# Altium PCB STM32F103C8T6_JLINK-OB_V1.0.PcbDoc
Units mil, origin at the board's own origin, x right, y up, seen from the top; angles counter-clockwise.
Board outline 1770 x 755 mil, 2 copper layers (Top Layer, Bottom Layer); 40 components, 32 nets, 139 pads, 110 vias.
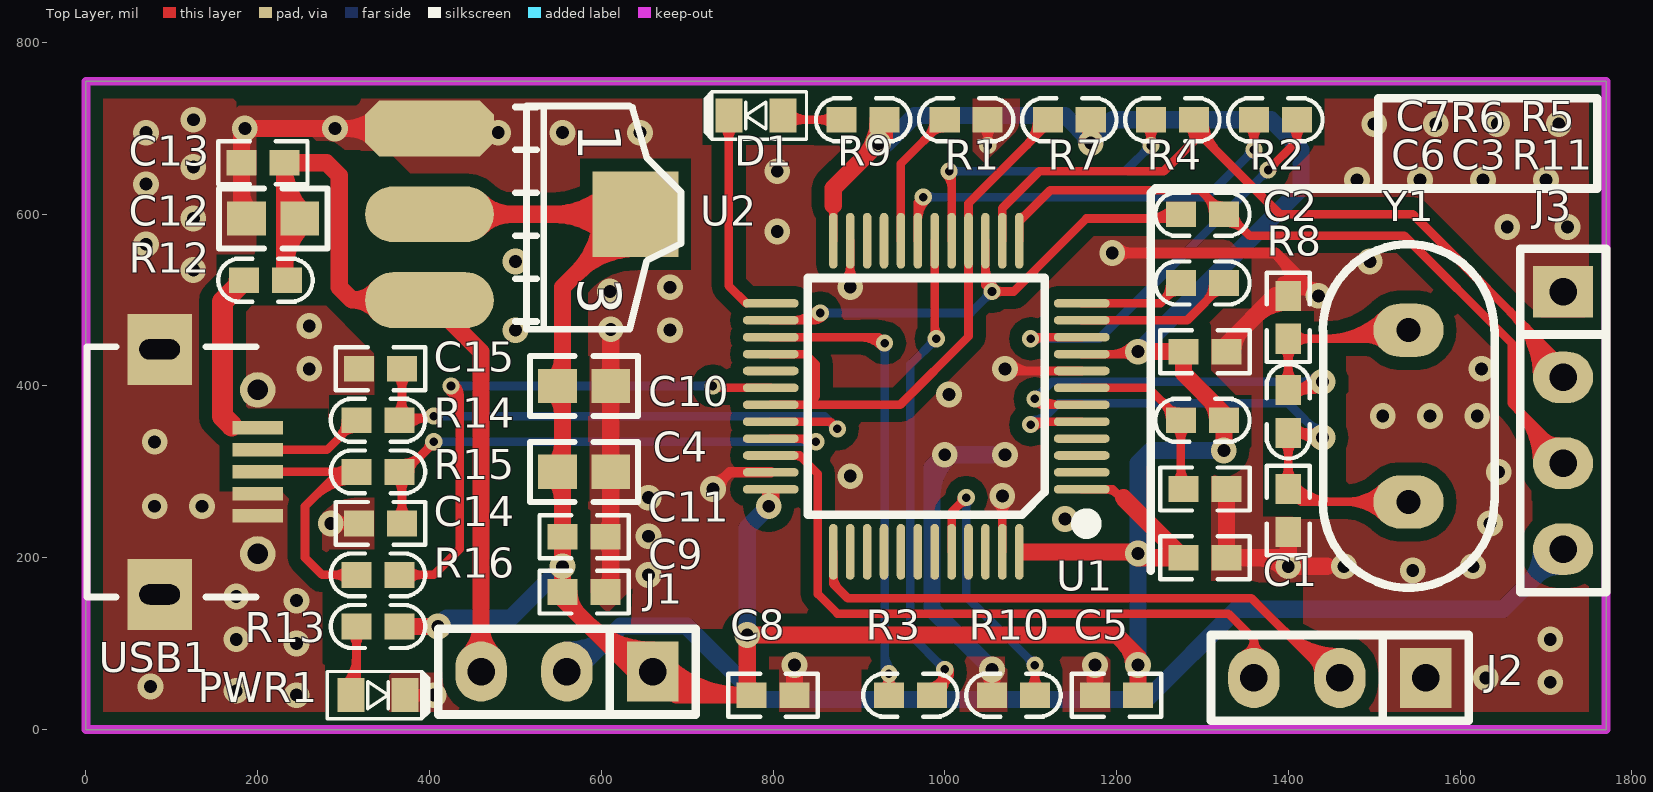
[diagram p0: Top Layer view]
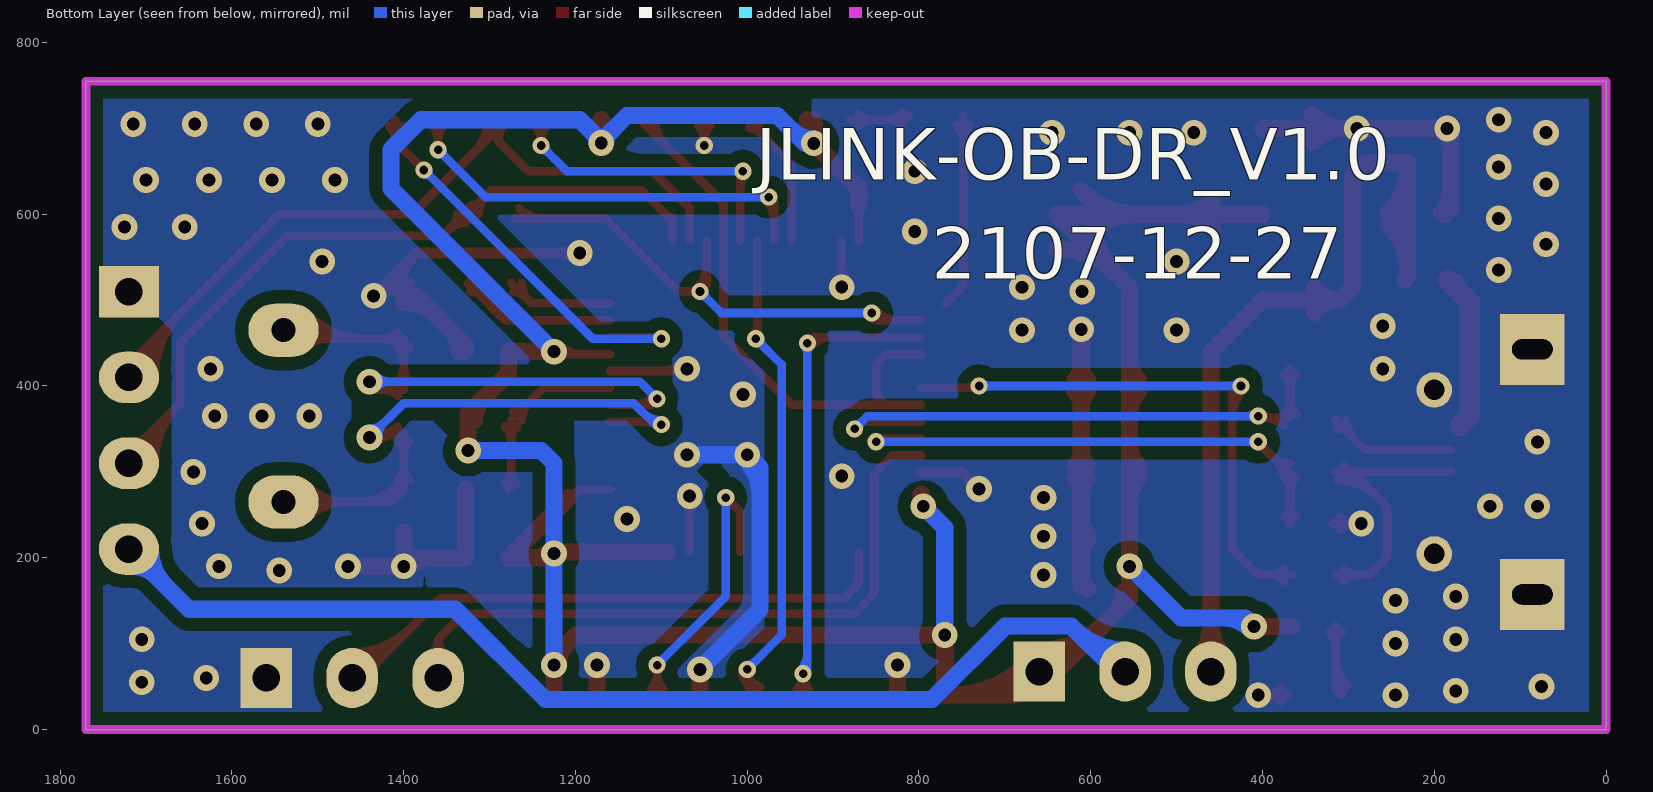
[diagram p1: Bottom Layer view, seen from below]
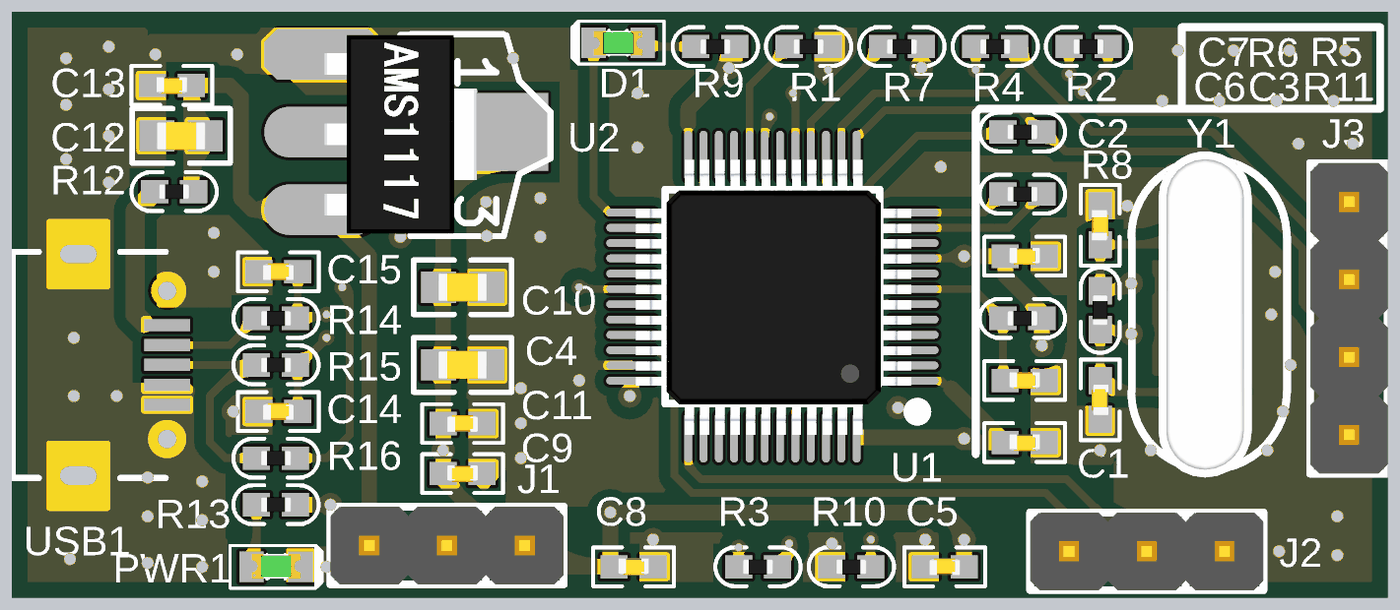
[diagram p2: 3D render of the assembled board from above, using the file's embedded part models]

## Layer stack, top to bottom
Top Layer: signal copper 1.4
Dielectric: dielectric 12.6, FR-4, Dk 4.8
Bottom Layer: signal copper 1.4

## Board outline
0,0 1770,0 1770,755 0,755

## Design rules (kind name [scope] priority, off if disabled: settings)
Clearance Clearance_1 [InPolygon] p1: gap=15
Clearance [All] p2: gap=7.87
MinimumSolderMaskSliver [All] p1 off: minsoldermaskwidth=10
PolygonConnect [All] p1: connectstyle=Direct reliefconductorwidth=10 reliefentries=4 polygonreliefangle="90 Angle"
RoutingVias [All] p1: holewidth=10 width=20 viastyle="Through Hole" minholewidth=8 minwidth=16 maxholewidth=28 maxwidth=50
SilkToSilkClearance [All] p1 off: silktosilkclearance=10
SilkscreenOverComponentPads [All] p1 off: minsilkscreentomaskgap=10
SolderMaskExpansion [All] p1: expansion=4
Width [All] p1: maxlimit=100 minlimit=7.87 preferedwidth=10
25 further rules are at their usual default settings.

## Components (designator, comment, footprint, x,y, rotation, side; value= is the part's Value field where it differs from the comment)
C1 "22pF" C0402 1400,255 r0 top
C2 "22pF" C0402 1400,480 r180 top
C3 "0.1uF" C0402 1303,280 r90 top
C4 "4.7uF" C0603 580,300 r270 top
C5 "1uF" C0402 1200,40 r270 top
C6 "0.1uF" C0402 1303,200 r90 top
C7 "0.1uF" C0402 1303,440 r90 top
C8 "0.1uF" C0402 800,40 r90 top
C9 "0.1uF" C0402 580,160 r90 top
C10 "10uF" C0603 580,400 r90 top
C11 "0.1uF" C0402 580,224.5 r270 top
C12 "10uF" C0603 218,595 r270 top
C13 "0.1uF" C0402 206,660 r90 top
C14 "22pF" C0402 343,240 r270 top
C15 "22pF" C0402 343,420 r270 top
D1 "LED1" LED0603-green 780,715 r180 top
J1 "CON3" HEADER-3 560,67.5 r180 top
J2 "CON3" HEADER-3 1460,60 r180 top
J3 "CON4" HEADER-4 1720,360 r270 top
PWR1 "RED" LED0603-green 340,40 r0 top
R1 "10K" "R0402 -1" 1025,710 r90 top
R2 "100R" "R0402 -1" 1385,710 r270 top
R3 "100R" "R0402 -1" 960,40 r90 top
R4 "100R" "R0402 -1" 1265,710 r90 top
R5 "100R" "R0402 -1" 1300,600 r90 top
R6 "100R" "R0402 -1" 1300,520 r270 top
R7 "10K" "R0402 -1" 1145,710 r270 top
R8 "1M" "R0402 -1" 1400,370.5 r0 top
R9 "510R" "R0402 -1" 905,710 r270 top
R10 "10K" "R0402 -1" 1080,40 r90 top
R11 "10K" "R0402 -1" 1300,360 r270 top
R12 "0R" "R0402 -1" 209,523.24 r90 top
R13 "510R" "R0402 -1" 340,120 r90 top
R14 "22R" "R0402 -1" 340,360 r270 top
R15 "22R" "R0402 -1" 340,300 r270 top
R16 "1.5K" "R0402 -1" 340,180 r90 top
U1 "STM32F103C8T6" LQFP48S 1160,280 r180 top locked
U2 "AMS1117-3.3" AMS1117 400,700 r270 top
USB1 "Micro usb" MICRO_USB_9 200,300 r270 top
Y1 "XTAL" XTAL 1540,365 r90 top

## Footprints (in the part's own frame and the unit in brackets; to place one, negate y for a bottom-side part, rotate by r counter-clockwise, add the part's x,y. Pads: shape width x height; smd on the part's side, far side on the other; paste and mask are expansions set on the pad)
AMS1117 [mil]
  oct 65x150 smd: 1(0.03,-0.06)
  oval 65x150 smd: 2(100.03,-0.06) 3(200.03,-0.06)
  rect 100x100 smd: 4(100.03,239.94)
  silkscreen extent -26,100 234,293, body extent -25,-38 231,238, height 33
C0402 [mil] "SMT电容"
  rect 30x35 smd: 1(0,-25) 2(0,25)
  silkscreen extent -25,-52 25,52, body extent -11,-20 11,20, height 20
C0603 [mil] "SMT电容"
  rect 40x45 smd: 1(0,31) 2(0,-31)
  silkscreen extent -35,-63 35,63, body extent -18,-32 18,31, height 31
HEADER-3 [mil]
  rect 60x70 hole 32: 1(-100,0)
  oval 60x70 hole 32: 2(0,0) 3(100,0)
  silkscreen extent -150,-50 150,50, body extent -150,-50 150,50, height 398
HEADER-4 [mil]
  rect 60x70 hole 32: 1(-150,0)
  oval 60x70 hole 32: 2(-50,0) 3(50,0) 4(150,0)
  silkscreen extent -200,-50 200,50, body extent -200,-50 200,50, height 398
LED0603-green [mm]
  rect 0.8x1 smd: 1(-0.8,0) 2(0.8,0)
  silkscreen extent -1.5,-0.7 1.5,0.7, body extent -0.8,-0.38 0.8,0.42, height 0.6
LQFP48S [mil] "DPIN-0.5"
  oval 65x10 smd: 1(0.42,0.29) 2(0.42,-19.39) 3(0.42,-39.08) 4(0.42,-58.76) 5(0.42,-78.45) 6(0.42,-98.13) 7(0.42,-117.82) 8(0.42,-137.5) 9(0.42,-157.19) 10(0.42,-176.87) 11(0.42,-196.56) 12(0.42,-216.24) 25(362.63,-216.24) 26(362.63,-196.56) 27(362.63,-176.87) 28(362.63,-157.19) 29(362.63,-137.5) 30(362.63,-117.82) 31(362.63,-98.13) 32(362.63,-78.45) 33(362.63,-58.76) 34(362.63,-39.08) 35(362.63,-19.39) 36(362.63,0.29)
  oval 10x65 smd: 13(73.26,-289.08) 14(92.94,-289.08) 15(112.63,-289.08) 16(132.31,-289.08) 17(152,-289.08) 18(171.68,-289.08) 19(191.37,-289.08) 20(211.05,-289.08) 21(230.74,-289.08) 22(250.42,-289.08) 23(270.11,-289.08) 24(289.79,-289.08) 37(289.79,73.13) 38(270.11,73.13) 39(250.42,73.13) 40(230.74,73.13) 41(211.05,73.13) 42(191.37,73.13) 43(171.68,73.13) 44(152,73.13) 45(132.31,73.13) 46(112.63,73.13) 47(92.94,73.13) 48(73.26,73.13)
  silkscreen extent -10,-246 319,46, body extent 3,-284 357,70, height 59
MICRO_USB_9 [mm]
  rect 0.4x1.5 smd: 1(-1.3,0) 2(-0.65,0) 3(0,0) 4(0.65,0) 5(1.3,0)
  round 1.05 hole 0.6: 6(-2.425,0) 7(2.425,0)
  rect 2.1x1.9 hole 0.6 slot 1.2 at 90 deg: 8(-3.625,-2.9) 9(3.625,-2.9)
  silkscreen extent -3.7,-5.05 3.7,-0.05
"R0402 -1" [mil] "SMT电阻"
  rect 30x35 smd: 1(0,-25) 2(0,25)
  silkscreen extent -25,-55 25,55, body extent -10,-20 10,20, height 15
XTAL [mil]
  oval 62x82 hole 28: 1(-100,0) 2(100,0)
  silkscreen extent -200,-100 200,100, body extent -210,-55 210,65, height 122

## Part data
C1 C2 C4 C5 C6 C7 C8 C9: library part CAP, "SMT电容"
C3 C11 C13: library part C
C10 C12: library part CAP
C14 C15: library part 电容
D1: library part LED0, "Typical INFRARED GaAs LED"
J1 J2 J3: "Connector"
PWR1: library part LED1
R1 R2 R3 R4 R5 R6 R7 R8 R9 R10 R11 R12 R13 R14 R15 R16: library part RES1, "SMT电阻"
U1: "STM32 ARM-based 32-bit MCU with 64 Kbytes Flash, 48-pin LQFP, Industrial Temperature"
U2: library part AMS1117
USB1: library part "USB joggle"
Y1: "Crystal Oscillator"

## Via types
v1: diameter 30, hole 15, Top Layer to Bottom Layer, tented both sides, 87 vias
v2: diameter 20, hole 10, Top Layer to Bottom Layer, tented both sides, 23 vias

## Nets (pads, with @x,y where several pads share a name; then routed paths per layer and width w, separated by ;. In a path a pad name is that pad's centre, name@x,y a point inside that pad or via, vN(x,y) a via of type N, cw(c..) or ccw(c..) an arc to the next point about the centre after c; other vN are vias at no path point)
4: U1.4
GND: C1.1 C2.1 C3.1 C4.1 C5.1 C6.1 C7.1 C8.1 C9.1 C10.2 C11.2 C12.2 C13.2 C14.1 C15.1 J2.1 J3.1 PWR1.2 R1.1 R10.2 U1.8 U1.23 U1.35 U1.47 U2.1 USB1.4 USB1.5 USB1.6 USB1.7 USB1.8 USB1.9 | length 3065.3
  Top Layer w10: v1@882.82,522.18 ccw(c865.75,539.25) 889.89,539.25 ccw(c914.03,539.25) v1@896.96,522.18 ; v1(889.89,515.11) U1.23 ; R1.1@1042.93,702.93 cw(c1025.86,685.86) 1050,685.86 cw(c1074.14,685.86) R1.1@1057.07,702.93 ; v2@1046.46,683.54 ccw(c1037.93,692.07) 1050,692.07 ccw(c1062.07,692.07) v2@1053.54,683.54 ; v2(1050,680) R1.1 ; v1@1059.98,264.98 cw(c1042.91,247.91) 1067.06,247.91 cw(c1091.2,247.91) v1@1074.13,264.98 ; U1.47 v1(1067.06,272.06) ; v1(1070,420) 1072.5,417.5 U1.8 ; v1@1077.07,412.93 cw(c1088.12,401.88) 1088.12,417.5 ; v1@1077.07,427.07 ccw(c1100.17,450.17) 1100.17,417.5
  Top Layer w12: v1(285,240) C14.1 ; v1@291.36,233.64 cw(c306.73,218.27) 306.73,240 cw(c306.73,261.73) v1@291.36,246.36 ; C14.1@309.14,233.64 ccw(c293.77,218.27) 293.77,240 ccw(c293.77,261.73) C14.1@309.14,246.36 ; PWR1.2 v1(405,40) ; PWR1.2@378.39,33.11 cw(c395.03,16.47) 395.03,40 cw(c395.03,63.53) PWR1.2@378.39,46.89 ; v1@398.64,33.64 ccw(c383.27,18.27) 383.27,40 ccw(c383.27,61.73) v1@398.64,46.36 ; v1(730,280) 749.39,299.39 U1.35 ; v1@730,289 ccw(c730,310.73) 745.36,295.36 ccw(c760.73,280) v1@739,280
  Top Layer w13: v1(1195,555) 1385,555 v1(1435,505) ; v1@1201.01,548.99 cw(c1215.52,534.48) 1215.52,555 cw(c1215.52,575.52) v1@1201.01,561.01 ; 1388.37,551.63 cw(c1348.9,512.17) C2.1@1404.48,507.09 ; C2.1@1393.22,521.13 cw(c1404.51,494.25) v1@1425.13,514.87 ; C2.1@1398.26,509.15 cw(c1412.61,474.98) v1@1438.81,501.19 ; v1@1426.5,505 ccw(c1405.98,505) 1420.49,519.51 ccw(c1435,534.02) v1@1435,513.5
  Top Layer w20: 181,627.59 ccw(c217.09,627.59) C12.2@191.57,602.07 ; 181,678.32 cw(c206.62,678.32) v1@188.5,696.43 ; C12.2@187,600 181,606 C13.2 181,696 v1(184.97,699.97) U2.1 ; U2.1@341.53,684.06 ccw(c303.12,645.65) 303.12,699.97 ccw(c303.12,754.29) U2.1@341.53,715.88 ; C9.1@603.96,163.54 ccw(c586.98,180.52) 611,180.52 ; C11.2@603.96,220.96 cw(c586.98,203.98) 611,203.98 ; C11.2@603.96,228.04 ccw(c586.98,245.02) 611,245.02 ; C4.1@603.93,292.93 cw(c586.86,275.86) 611,275.86 cw(c635.14,275.86) C4.1@618.07,292.93 ; C4.1@603.93,307.07 ccw(c586.86,324.14) 611,324.14 ccw(c635.14,324.14) C4.1@618.07,307.07 ; C10.2@603.93,392.93 cw(c586.86,375.86) 611,375.86 cw(c635.14,375.86) C10.2@618.07,392.93 ; C10.2@603.93,407.07 ccw(c586.86,424.14) 611,424.14 ccw(c635.14,424.14) C10.2@618.07,407.07 ; C9.1@611,166 C4.1 C10.2 v1(611,466) ; C8.1 v1(825,75) ; R10.2 v1(1055,70) ; C5.1 v1(1175,75) ; C3.1 C6.1 1395,200 1400,205 ; C7.1 1328,448 C2.1@1385,505 ; C7.1@1335.5,440 cw(c1372.92,440) 1346.46,466.46 ; 1361.59,481.59 cw(c1400,443.18) C2.1@1400,497.5 ; 1363.79,200 cw(c1363.79,153.79) v1@1396.46,186.46 ; C1.1 1400,205 ; 1445,190 v1(1400,190) 1400,205
  Bottom Layer w20: 985,271.72 cw(c1048.28,271.72) v1@1003.54,316.46 ; v1(1055,70) 985,140 985,305 v1(1000,320) v1@1055,320
  other v1: 245,40 175,45 75,50 1705,55 1630,60 245,100 175,105 1705,105 245,150 175,155 655,180 1545,185 1465,190 1615,190 655,225 1635,240 1140,245 80,260 135,260 655,270 890,295 1645,300 1070,320 80,335 1510,365 1565,365 1620,365 1005,390 260,420 1625,420 500,465 680,465 260,470 610,510 680,515 125,535 500,545 1495,545 70,565 805,580 1655,585 1725,585 125,595 70,635 1480,640 1553.33,640 1626.67,640 1700,640 805,650 125,655 70,695 480,695 555,695 645,695 290,699.97 1500,705 1571.67,705 1643.33,705 1715,705 125,710
JTCK: J2.2 U1.37 | length 880.1
  Top Layer w10: U1.37@870.21,179.37 ccw(c893.33,179.37) 876.98,163.02 ; U1.37 870.21,169.79 887.13,152.87 1357.13,152.87 1450,60 J2.2 ; 1391.72,118.28 ccw(c1460,186.57) J2.2@1460,90 ; 1408.79,101.21 ccw(c1460,152.43) J2.2@1460,80 ; 1425.86,84.14 ccw(c1460,118.28) J2.2@1460,70 ; 1427.93,82.07 cw(c1410.86,65) J2.2@1435,65
JTMS: J2.3 U1.34 | length 843.3
  Top Layer w10: U1.34 830.92,319.08 852.33,297.67 852.33,157.67 875,135 1330,135 1360,105 ; 833.95,316.05 ccw(c826.38,308.49) 824.87,319.08 cw(c824.87,304.47) 835.2,314.8 ; J2.3@1349.05,87.47 ccw(c1340.5,105) 1360,105 ; J2.3 1360,105 ; J2.3@1370.95,87.47 cw(c1379.5,105) 1360,105
LED: D1.2 U1.25 | length 267.9
  Top Layer w10: D1.2@740.9,703.46 cw(c722.56,685.11) 748.5,685.11 cw(c774.45,685.11) D1.2@756.1,703.46 ; D1.2 748.5,516.5 U1.25@768.76,496.24
NetC1_2: C1.2 R8.1 U1.5 Y1.1 | length 1149.9
  Top Layer w10: v2@1103.45,358.45 U1.5 ; v2@1103.54,351.46 cw(c1120.4,334.6) 1120.4,358.45 ; C1.2@1392.93,289.57 ccw(c1375.86,306.64) 1400,306.64 ccw(c1424.14,306.64) C1.2@1407.07,289.57 ; R8.1@1392.93,335.93 cw(c1375.86,318.86) 1400,318.86 cw(c1424.14,318.86) R8.1@1407.07,335.93 ; C1.2@1400,277.5 ccw(c1430.18,307.68) 1430.18,265 ; R8.1@1402.58,345.5 cw(c1402.58,302.58) v1@1432.93,332.93 ; C1.2@1407.07,284.57 ccw(c1454.32,331.82) 1454.32,265 ; R8.1@1407.07,338.43 cw(c1424.14,321.36) 1424.14,345.5 cw(c1424.14,369.64) R8.1@1407.07,352.57 ; v1(1440,340) 1434.5,345.5 R8.1 C1.2 1415,265 Y1.1 ; Y1.1@1511.62,246.62 ccw(c1467.23,202.23) 1467.23,265 ccw(c1467.23,327.77) Y1.1@1511.62,283.38 ; Y1.1@1518.69,253.69 ccw(c1491.37,226.37) 1491.37,265 ccw(c1491.37,303.63) Y1.1@1518.69,276.31
  Bottom Layer w10: v2(1100,355) 1107.35,355 1132.35,380 1400,380 v1(1440,340) ; v2@1100,360 ccw(c1100,389.81) 1121.08,368.73 ; v1@1430,340 ccw(c1405.86,340) 1422.93,357.07 ccw(c1440,374.14) v1@1440,350
NetC2_2: C2.2 R8.2 U1.6 Y1.2 | length 1124.7
  Top Layer w10: v2(1105,385) 1111.87,378.13 U1.6 ; v2@1108.54,388.54 ccw(c1133.65,413.65) U1.6@1133.65,378.13 ; R8.2@1392.93,405.07 ccw(c1375.86,422.14) 1400,422.14 ccw(c1424.14,422.14) R8.2@1407.07,405.07 ; C2.2@1392.93,445.43 cw(c1375.86,428.36) 1400,428.36 cw(c1424.14,428.36) C2.2@1407.07,445.43 ; R8.2@1407.07,388.43 cw(c1424.14,371.36) 1424.14,395.5 cw(c1424.14,419.64) R8.2@1407.07,402.57 ; C2.2@1407.07,447.93 cw(c1424.14,430.86) 1424.14,455 cw(c1424.14,479.14) C2.2@1407.07,462.07 ; 1420.51,395.5 ccw(c1420.51,420.23) v1(1440,405) ; v1@1430.5,395.5 R8.2 ; v1@1432.12,411.16 cw(c1400,436.27) R8.2 ; 1443.09,455 ccw(c1443.09,551.91) Y1.2@1511.62,483.38 ; 1467.23,455 ccw(c1467.23,527.77) Y1.2@1518.69,476.31 ; Y1.2@1511.62,446.62 ccw(c1491.37,426.37) 1491.37,455 ccw(c1491.37,503.63) Y1.2@1525.76,469.24 ; Y1.2 1530,455 C2.2 R8.2
  Bottom Layer w10: v2(1105,385) 1125,405 v1(1440,405) ; v2@1105,390 ccw(c1105,402.07) 1113.54,393.54 ccw(c1122.07,385) v2@1110,385 ; v1@1432.93,397.93 ccw(c1415.86,380.86) 1415.86,405 ccw(c1415.86,429.14) v1@1432.93,412.07
NetC3_2: C3.2 R11.1 U1.7 | length 326.1
  Top Layer w10: U1.7 1237.18,397.82 R11.1 1275,283 C3.2 ; 1253.66,381.34 cw(c1232.32,360) R11.1@1262.5,360 ; 1259.7,375.3 ccw(c1272.5,388.11) R11.1@1272.5,370 ; R11.1@1267.93,352.93 cw(c1250.86,335.86) 1275,335.86 cw(c1299.14,335.86) R11.1@1282.07,352.93 ; C3.2@1268.43,287.07 ccw(c1252.57,302.93) 1275,302.93 ; 1275,305.35 ccw(c1300.85,305.35) C3.2@1282.57,287.07
NetD1_1: D1.1 R9.1 | length 149.3
  Top Layer w10: D1.1 816.5,710 R9.1 ; D1.1@819.1,703.46 cw(c834.88,687.68) 834.88,710 ; D1.1@819.1,718.66 ccw(c840.01,739.58) 840.01,710 ; R9.1@870.43,702.93 ccw(c853.36,685.86) 853.36,710 ccw(c853.36,734.14) R9.1@870.43,717.07
NetPWR1_1: PWR1.1 R13.2 | length 177.3
  Top Layer w10: PWR1.1@300.9,51.54 ccw(c266.87,85.57) 315,85.57 ; PWR1.1@307.97,44.47 ccw(c291.01,61.43) 315,61.43 ; R13.2@307.93,112.93 cw(c290.86,95.86) 315,95.86 cw(c339.14,95.86) R13.2@322.07,112.93 ; PWR1.1 315,46.5 R13.2
NetR1_2: R1.2 U1.20 | length 239.9
  Top Layer w10: 948.95,608.95 U1.20 948.95,658.95 R1.2 ; 978.66,688.66 ccw(c957.32,710) R1.2@987.5,710 ; 984.7,694.7 cw(c997.5,681.89) R1.2@997.5,700
NetR10_1: R10.1 U1.44 | length 447.1
  Top Layer w10: U1.44 1008,253 v2(1025,270) ; v2@1020,270 cw(c1007.93,270) 1016.46,261.46 cw(c1025,252.93) v2@1025,265 ; R10.1@1097.93,47.07 ccw(c1080.86,64.14) 1105,64.14 ccw(c1129.14,64.14) R10.1@1112.07,47.07 ; v2@1101.46,71.46 cw(c1092.93,62.93) 1105,62.93 cw(c1117.07,62.93) v2@1108.54,71.46 ; R10.1 v2(1105,75)
  Bottom Layer w10: v2@1021.46,266.46 cw(c1012.93,257.93) 1025,257.93 cw(c1037.07,257.93) v2@1028.54,266.46 ; v2(1025,270) 1025,155 v2(1105,75) ; v2@1100,75 ccw(c1087.93,75) 1096.46,83.54 ccw(c1105,92.07) v2@1105,80
NetR14_1: R14.1 USB1.2 | length 187.2
  Top Layer w10: USB1.2@180,325.59 280.59,325.59 R14.1 ; 293.66,338.66 ccw(c272.32,360) R14.1@302.5,360 ; 299.7,344.7 cw(c312.5,331.89) R14.1@312.5,350
NetR15_1: R15.1 R16.2 USB1.3 | length 565.9
  Top Layer w10: USB1.3@180,300 295,300 ; 265.55,270.55 cw(c312.5,223.61) R15.1@312.5,290 ; 282.63,287.63 cw(c312.5,257.75) 312.5,300 ccw(c303.8,289.34) 294.07,299.07 ; 286.25,291.25 cw(c296.77,280.73) R15.1@306.18,292.25 ; R16.2@305.43,172.93 ccw(c288.36,155.86) 288.36,180 ccw(c288.36,204.14) R16.2@305.43,187.07 ; R15.1@305.43,292.93 ccw(c288.36,275.86) 288.36,300 ccw(c288.36,324.14) R15.1@305.43,307.07 ; R16.2 275,180 255,200 255,260 295,300 ; R15.1 295,300 ; 295,300 cw(c295,289.69) 303.88,294.92 ccw(c295,289.69) 295,300 ; 295,300 ccw(c295,310.31) 303.88,305.08 cw(c295,310.31) 295,300
TCKIN: J3.3 R5.1 U1.13 | length 1125.2
  Top Layer w10: U1.13 1086.74,591.74 1122.87,627.87 1297.83,627.87 1325,600.71 R5.1 ; U1.13@1086.74,596.58 ccw(c1086.74,608.26) 1095,600 ; 1303.16,622.54 cw(c1280.62,600) R5.1@1312.5,600 ; R5.1@1310.9,614.8 ccw(c1322.5,626.4) R5.1@1322.5,610 ; R5.1@1325,599.29 R5.1 ; R5.1@1327.5,590 cw(c1327.5,559.82) 1348.84,581.16 ; R5.1@1337.5,600 ccw(c1355.61,600) 1342.8,587.2 ; 1661.72,378.28 cw(c1593.43,310) J3.3@1690,310 ; 1678.79,361.21 cw(c1627.57,310) J3.3@1700,310 ; 1695.86,344.14 cw(c1661.72,310) J3.3@1710,310 ; 1697.93,342.07 ccw(c1715,359.14) J3.3@1715,335 ; J3.3 1720,320 1660,380 1660,450 1535,575 1355,575 1330,600 R5.1
TCKOUT: R5.2 U1.15 U1.26 | length 753.2
  Top Layer w10: U1.26 846.56,476.56 v2(855,485) ; U1.26@822.55,476.56 ccw(c822.55,517.45) v2@851.46,488.54 ; 846.69,476.56 ccw(c846.69,493.31) v2@858.54,481.46 ; U1.15@1047.37,540.49 ccw(c1085.49,540.49) 1058.54,513.54 ccw(c1067.07,522.07) 1067.07,510 ccw(c1067.07,497.93) v2@1058.54,506.46 ; U1.15 1047.37,517.63 v2(1055,510) ; v2@1055,515 v2(1055,510) ; 1104.61,534.18 1080.44,510 v2(1055,510) ; 1104.61,534.61 1165,595 R5.2@1270,595 ; 1236.29,595 ccw(c1236.29,636.21) R5.2@1265.43,607.07
  Bottom Layer w10: v2(855,485) 915.97,485 1030,485 v2(1055,510) ; v2@858.54,481.46 cw(c867.07,472.93) 867.07,485 cw(c867.07,497.07) v2@858.54,488.54 ; v2@1050,510 cw(c1037.93,510) 1046.46,501.46 cw(c1055,492.93) v2@1055,505
TDIIN: R3.1 U1.18 | length 767.9
  Top Layer w10: R3.1@984.7,49.6 ccw(c978.75,70) v2(1000,70) 1000,55 R3.1 ; R3.1@987.5,40 ccw(c982.64,56.67) 1000,56.67 ; 988.32,471.14 ccw(c1006.14,471.14) v2@993.54,458.54 ; 988.32,525 U1.18 988.32,456.68 v2(990,455) ; R3.1@992.5,47.5 ccw(c980.32,59.68) v2@995.57,67.68 ; v2@996.46,66.46 cw(c987.93,57.93) 1000,57.93 cw(c1012.07,57.93) v2@1003.54,66.46 ; 1002.11,57.11 ccw(c992.93,66.29) v2@1004.43,72.32
  Bottom Layer w10: v2@985,455 cw(c972.93,455) 981.46,446.46 cw(c990,437.93) v2@990,450 ; v2(990,455) 960,425 960,110 v2(1000,70) ; v2@995,70 ccw(c982.93,70) 991.46,78.54 ccw(c1000,87.07) v2@1000,75
TDIOUT: R3.2 U1.27 | length 674.2
  Top Layer w10: U1.27 923.13,456.87 v2(930,450) ; 901.33,456.87 cw(c901.33,421.33) v2@926.46,446.46 ; R3.2@927.93,47.07 ccw(c910.86,64.14) 935,64.14 ccw(c959.14,64.14) R3.2@942.07,47.07 ; v2@931.46,61.46 cw(c922.93,52.93) 935,52.93 cw(c947.07,52.93) v2@938.54,61.46 ; R3.2 v2(935,65)
  Bottom Layer w10: v2@926.46,446.46 cw(c917.93,437.93) 930,437.93 cw(c942.07,437.93) v2@933.54,446.46 ; 930,89.14 ccw(c959.14,89.14) v2@938.54,68.54 ; v2(930,450) 930,70 v2(935,65)
TDOIN: R7.1 U1.16 U1.28 U1.31 | length 695.7
  Top Layer w10: U1.31 840,378.13 ; U1.28 837.81,437.19 850,425 850,388.13 840,378.13 ; 1095.13,680.13 ccw(c1065.25,710) R7.1@1107.5,710 ; R7.1 1120,705 1027.69,612.69 U1.16 1027.69,457.69 948.13,378.13 840,378.13
TMSIN: J3.2 R4.1 U1.14 | length 1170.5
  Top Layer w10: U1.14 1067.06,607.06 1110,650 1255,650 1290,685 1290,700 1390,600 1545,600 1720,425 J3.2 ; R4.1@1282.93,702.93 cw(c1265.86,685.86) 1290,685.86 cw(c1314.14,685.86) R4.1@1297.07,702.93 ; R4.1@1292.5,710 ccw(c1322.68,710) 1301.34,688.66 ; R4.1@1302.5,710 ccw(c1356.82,710) 1318.41,671.59 ; 1658.18,486.82 cw(c1581.36,410) J3.2@1690,410 ; 1675.25,469.75 cw(c1615.5,410) J3.2@1700,410 ; 1692.32,452.68 cw(c1649.64,410) J3.2@1710,410
TMSOUT: R4.2 U1.17 | length 471.9
  Top Layer w10: v2@1001.46,646.46 cw(c985.69,630.69) 1008,630.69 ; v2(1005,650) 1008,647 U1.17 ; R4.2@1232.93,702.93 cw(c1215.86,685.86) 1240,685.86 cw(c1264.14,685.86) R4.2@1247.07,702.93 ; v2@1236.46,683.54 ccw(c1227.93,692.07) 1240,692.07 ccw(c1252.07,692.07) v2@1243.54,683.54 ; v2(1240,680) R4.2
  Bottom Layer w10: v2(1005,650) 1210,650 v2(1240,680) ; v2@1008.54,646.46 cw(c1017.07,637.93) 1017.07,650 cw(c1017.07,662.07) v2@1008.54,653.54 ; v2@1235,680 cw(c1222.93,680) 1231.46,671.46 cw(c1240,662.93) v2@1240,675
TRESIN: R6.1 U1.12 | length 163.2
  Top Layer w10: U1.12 1251.24,496.24 R6.1 ; 1253.66,498.66 ccw(c1232.32,520) R6.1@1262.5,520 ; 1259.7,504.7 cw(c1272.5,491.89) R6.1@1272.5,510
TRESOUT: R6.2 U1.11 | length 221.8
  Top Layer w10: U1.11 1282.27,476.56 1325,519.29 R6.2 ; 1303.16,497.46 ccw(c1280.62,520) R6.2@1312.5,520 ; R6.2@1310.9,505.2 cw(c1322.5,493.6) R6.2@1322.5,510
TRSTIN: R2.1 U1.19 | length 617.7
  Top Layer w10: U1.19 968.63,613.63 v2(975,620) ; U1.19@968.63,592.55 cw(c1002.45,592.55) v2@978.54,616.46 ; R2.1@1352.93,702.93 cw(c1335.86,685.86) 1360,685.86 cw(c1384.14,685.86) R2.1@1367.07,702.93 ; v2@1356.46,678.54 ccw(c1347.93,687.07) 1360,687.07 ccw(c1372.07,687.07) v2@1363.54,678.54 ; v2(1360,675) R2.1
  Bottom Layer w10: v2(975,620) 1305,620 v2(1360,675) ; v2@978.54,616.46 cw(c987.07,607.93) 987.07,620 cw(c987.07,632.07) v2@978.54,623.54 ; v2@1355,675 cw(c1342.93,675) 1351.46,666.46 cw(c1360,657.93) v2@1360,670
TRSTOUT: R2.2 U1.10 | length 589.9
  Top Layer w10: v2(1100,455) 1101.87,456.87 U1.10 ; v2@1103.54,451.46 cw(c1116.6,438.4) 1116.6,456.87 ; v2(1376.46,651.46) 1410,685 R2.2 ; v2@1376.46,656.46 ccw(c1376.46,668.54) 1385,660 ccw(c1393.54,651.46) v2@1381.46,651.46 ; R2.2@1402.93,702.93 cw(c1385.86,685.86) 1410,685.86 cw(c1434.14,685.86) R2.2@1417.07,702.93
  Bottom Layer w10: v2@1103.54,451.46 cw(c1112.07,442.93) 1112.07,455 cw(c1112.07,467.07) v2@1103.54,458.54 ; 1110,455 1180,455 v2(1376.46,651.46) ; v2@1371.46,651.46 cw(c1359.39,651.46) 1367.93,642.93 cw(c1376.46,634.39) v2@1376.46,646.46
USB_CK: R16.1 U1.30 | length 794.6
  Top Layer w10: R16.1 405,180 435,210 435,390 v2(425,400) ; R16.1@374.57,172.93 cw(c391.64,155.86) 391.64,180 cw(c391.64,204.14) R16.1@374.57,187.07 ; v2@421.46,396.46 cw(c388.79,363.79) 435,363.79 ; v2@428.54,403.54 cw(c412.93,387.93) 435,387.93 ; v2(730,400) 732.18,397.82 U1.30 ; v2@733.54,403.54 ccw(c747.34,417.34) 747.34,397.82
  Bottom Layer w10: v2(425,400) v2(730,400) ; v2@428.54,396.46 cw(c437.07,387.93) 437.07,400 cw(c437.07,412.07) v2@428.54,403.54 ; v2@726.46,396.46 ccw(c717.93,387.93) 717.93,400 ccw(c717.93,412.07) v2@726.46,403.54
USB_DN: C15.2 R14.2 U1.32 | length 820.7
  Top Layer w10: R14.2@360.43,367.07 ccw(c342.15,385.35) 368,385.35 ; C15.2@360.93,412.93 cw(c343.86,395.86) 368,395.86 cw(c392.14,395.86) C15.2@375.07,412.93 ; 368,382.93 ccw(c390.43,382.93) 374.57,367.07 ccw(c384.4,376.9) 384.4,363 ; C15.2 368,363 403,363 v2(405,365) ; R14.2@374.57,352.93 cw(c398.88,328.62) v2@398.88,363 ; 388.1,363 ccw(c388.1,381.9) v2@401.46,368.54 ; U1.32 866.55,358.45 v2(875,350)
  Bottom Layer w10: v2@403,365 v2(405,365) 860,365 v2(875,350) ; v2@408.54,361.46 cw(c417.07,352.93) 417.07,365 cw(c417.07,377.07) v2@408.54,368.54 ; v2@870,350 ccw(c857.93,350) 866.46,358.54 ccw(c875,367.07) v2@875,355
USB_DP: C14.2 R15.2 U1.33 | length 799.7
  Top Layer w10: R15.2@360.43,292.93 cw(c342.15,274.65) 368,274.65 ; C14.2@360.93,247.07 ccw(c343.86,264.14) 368,264.14 ccw(c392.14,264.14) C14.2@375.07,247.07 ; R15.2@367.5,310 ccw(c367.5,342.59) 390.55,319.55 ; C14.2 368,297 405,334 v2(405,335) ; 368,277.07 cw(c390.43,277.07) R15.2@374.57,292.93 ; R15.2@377.5,300 cw(c393.19,300) R15.2@382.1,311.1 ; 395.76,324.76 ccw(c385.51,335) v2@400,335 ; 398.17,327.17 cw(c405,320.34) v2@405,330 ; U1.33 846.24,338.76 v2(850,335) ; U1.33@828.84,338.76 cw(c828.84,313.84) v2@846.46,331.46
  Bottom Layer w10: v2(405,335) v2(850,335) ; v2@408.54,331.46 cw(c417.07,322.93) 417.07,335 cw(c417.07,347.07) v2@408.54,338.54 ; v2@846.46,331.46 ccw(c837.93,322.93) 837.93,335 ccw(c837.93,347.07) v2@846.46,338.54
V3.3: C4.2 C5.2 C6.2 C7.2 C8.2 C9.2 C10.1 C11.1 J1.1 R7.2 R9.2 R11.2 R13.1 U1.1 U1.9 U1.24 U1.36 U1.48 U2.2 U2.4 | length 5104.1
  Top Layer w10: U1.24 870.21,610 ; U1.1 1195.29,279.71 1205,270 ; U1.9 v1@1222.19,437.19 ; 1194.07,437.19 ccw(c1194.07,470.93) v1@1217.93,447.07 ; 1199.4,275.6 ccw(c1189.13,265.33) 1187.08,279.71 cw(c1187.08,259.87) 1201.1,273.9 ; 1207.64,437.19 cw(c1207.64,422.64) v1@1217.93,432.93
  Top Layer w20: R13.1 v1(410,120) ; U2.2 U2.4 555,515.03 C11.1 v1(555,190) C9.2 555,152.22 639.72,67.5 J1.1 687.5,40 C8.2 770,45 v1(770,110) 1200,110 v1@1225,85 ; U2.2@458.35,584.06 cw(c496.76,545.65) 496.76,599.97 cw(c496.76,654.29) U2.2@458.35,615.88 ; C4.2@544.43,292.93 cw(c518.91,267.41) 555,267.41 ; C4.2@544.43,307.07 ccw(c518.91,332.59) 555,332.59 ; C10.1@544.43,392.93 cw(c518.91,367.41) 555,367.41 ; C10.1@544.43,407.07 ccw(c518.91,432.59) 555,432.59 ; C9.2@562.5,160 ccw(c599.38,160) 573.3,133.92 ; 582.71,124.52 ccw(c660,201.81) J1.1@660,92.5 ; U2.4@599.94,599.97 cw(c503.37,599.97) 571.65,531.68 cw(c639.94,463.4) U2.4@639.94,559.97 ; U2.4@611.65,571.68 ccw(c543.37,503.4) 543.37,599.97 ccw(c543.37,696.54) U2.4@611.65,628.25 ; 616.85,90.37 ccw(c660,133.53) J1.1@660,72.5 ; J1.1@660,62.5 ccw(c714.32,116.82) 714.32,40 ; J1.1@674.14,76.64 ccw(c762.6,165.1) C8.2@762.6,40 ; 770,58.11 ccw(c790.61,58.11) C8.2@776.04,43.54 ; v1@797.37,262.37 v1@797.37,274 ; 870.21,610 870.21,630.21 930,690 R9.2 cw(c898.51,710) v1@919.24,686.29 ; 903.05,663.05 ccw(c856.11,710) R9.2@922.5,710 ; 1093,206.87 v1@1218.13,206.87 ; v1@1170,685 R7.2 ; 1208,270 C6.2 v1@1225,200 ; 1208.4,206.87 cw(c1208.4,188.4) v1@1221.46,201.46 ; 1209.39,100.61 cw(c1183.79,75) v1@1220,75 ; C5.2 v1(1225,75) ; v1(1225,440) C7.2 1278,414.78 1325,367.78 R11.2 v1(1325,325) ; v1@1228.54,208.54 ccw(c1249.14,229.14) 1249.14,200 ; C6.2@1265.2,212.8 cw(c1252.39,200) C6.2@1270.5,200 ; 1306.7,386.08 cw(c1280.62,360) R11.2@1317.5,360
  Bottom Layer w20: v1(410,120) 420,130 495,130 v1(555,190) ; v1@413.54,116.46 cw(c446.21,83.79) 446.21,130 ; v1(770,110) 770,235 v1(795,260) ; v1(922.53,682.53) 932.53,682.53 965,715 1140,715 1170,685 1195,710 1380,710 1415,675 1415,630 v1(1225,440) ; v1@922.53,687.53 ccw(c922.53,723.74) 948.14,698.14 ; 1160.05,694.95 cw(c1148.1,683) v1@1165,683 ; v1@1175,683 cw(c1191.9,683) 1179.95,694.95 ; v1(1225,75) v1(1225,205) 1225,310 1240,325 v1(1325,325)
  other v1: 1170,683
V5.0: C12.1 C13.1 J1.3 R12.1 U2.3 | length 1217.4
  Top Layer w20: R12.1@231,533.44 cw(c308.06,533.44) C12.1@253.57,587.93 ; C12.1@231,581.72 cw(c259.78,581.72) C12.1@239.43,602.07 ; C12.1@231,608.28 ccw(c259.78,608.28) C12.1@239.43,587.93 ; C13.1@231,656.56 ccw(c308.06,656.56) C12.1@253.57,602.07 ; R12.1 231,526.24 C13.1 280,660 295,645 295,515 310.03,499.97 ; U2.3@340,485.74 ccw(c310.03,461.29) 310.03,499.97 ; U2.3@340,514.19 cw(c310.03,538.65) 310.03,499.97 ; J1.3@445.86,86.64 ccw(c411.72,120.78) 460,120.78 ccw(c508.28,120.78) J1.3@474.14,86.64 ; J1.3 460,439.9 U2.3 310.03,499.97
VBUS: R12.2 USB1.1 | length 195.1
  Top Layer w15: R12.2@173.24,523.24 R12.2
  Top Layer w25: 170,353.84 158.96,364.88 158.96,498.2 R12.2
VCC_CON: J1.2 J3.4 | length 1431.4
  Bottom Layer w20: J1.2 569.72,67.5 622.6,120.37 699.63,120.37 785,35 1055,35 1235,35 1340,140 1650,140 J3.4 ; J1.2@560,92.5 ccw(c560,176.33) 619.27,117.05 ; 1677.32,167.32 ccw(c1634.64,210) J3.4@1695,210 ; 1689.39,179.39 cw(c1715,153.79) J3.4@1715,190
pads on no net: U1.2 U1.3 U1.21 U1.22 U1.29 U1.38 U1.39 U1.40 U1.41 U1.42 U1.43 U1.45 U1.46

## Polygon pours and split planes (outlines as drawn)
GND on Top Layer "Bottom Layer-No Net 1" (solid, remove dead copper): 0,755 1770,755 1770,5 1775,0 0,0 0,755
GND on Bottom Layer "Bottom Layer-No Net 1" (solid, remove dead copper): 0,750 0,-5 1775,-5 1765,5 1765,750 0,750

## Keep-outs
Keep-Out Layer:
  the board outline again, w10

## Other copper
Top Layer:
  pour cut-out: 244.53,374.06 282.5,374.06 282.11,360 272.14,345.98 244.53,345.98
  pour cut-out: 1192.5,70 1192.5,81.45 1194.51,79.44 1194.51,72.25 1195.19,71.57 1193.63,70
  pour cut-out: 1137.5,70 1134.13,70 1129.37,74.76 1129.37,81.34 1132.54,84.51
  pour cut-out: 1072.5,70 1070,72.5 1070,85 1076.97,85 1080.63,81.34 1080.63,74.76 1076.56,70.69 1076.56,70
  pour cut-out: 263.5,690 278.5,675 320,675 320,669 313.53,662.52 301.05,675 273.99,675 263.5,685.49
  pour cut-out: 198.5,630 198.5,560.25 195,550 205.51,553.24 210,557.73 210,615 205.51,619.49 205.51,630
  pour cut-out: 236.16,267.8 237.09,268.73 237.09,277.13 232.13,277.13 230,275 236.16,268.84
  pour cut-out: 277.76,74.68 275,77.44 275,159.61 282.5,159.61 282.5,90 294.61,90 292.27,87.66 292.27,74.68
  pour cut-out: 587.5,254.5 584.71,257.29 584.71,508.69 576.31,508.69 580.49,504.51 580.49,254.5
  pour cut-out: 1032.5,680 1032.5,673.17 1045.92,659.75 1036.63,650.47 1030.4,650.47 1005,675.87 1005,676.46 1008.54,680
  pour cut-out: 842.24,689.61 847.5,689.61 847.5,680.32 842.24,680.32
  pour cut-out: 1114.51,270 1101.16,256.65 1101.16,238.34 1107.13,232.36 1203.06,232.36 1203.06,233.54 1203.89,234.37 1185.07,253.19 1185.07,259.32 1125.19,259.32
  pour cut-out: 1310.5,250 1310.5,224.82 1289.23,224.82 1269.47,244.58 1269.47,248.89 1270.58,250
  pour cut-out: 1414.8,171.5 1406.22,162.91 1375.17,162.91 1366.58,171.5
  pour cut-out: 1695,480 1745.44,480 1749.61,484.17 1749.61,453.01 1748.23,453.01 1745.45,450.24 1740.3,455.39 1718.45,455.39 1718.45,456.55
  pour cut-out: 323,450 335,438 335,435 350,450 325.26,474.74 308.72,474.74 308.72,472.69 306.37,470.33 323,453.7
  pour cut-out: 1424.95,187.31 1417.53,179.89 1417.53,123.01 1415.07,123.01 1369.27,168.82 1371.95,171.5 1397.64,171.5 1406.22,162.91 1424.95,181.65
  pour cut-out: 1684.07,277.01 1684.07,243.26 1685.81,245 1755,245 1755,270 1747.09,277.91 1682.91,277.91 1682.91,267.09 1685,265
  pour cut-out: 1467.23,434.61 1467.23,285.4 1441.61,285.4 1430,297.01 1432.82,299.83 1432.82,309.74 1451.05,309.74 1466.22,324.91 1461.4,329.74 1461.4,361.4 1442.16,361.4 1434.08,369.48 1434.08,375.52 1452.22,375.52 1470.26,393.56 1470.26,412.08 1447.86,434.49 1447.86,434.61
  pour cut-out: 705,117.5 740.73,117.5 744.51,113.72 744.51,70.7 742.49,70.7 739.74,67.95 735.06,72.64 715.89,72.64 705,83.53
  pour cut-out: 635,115 615,120 609.79,134.6 609.79,138.23 636.49,164.93
  pour cut-out: 414.42,66.15 356.15,66.15 353.37,63.37 353.37,20.39 339.25,20.39 335.39,24.25 335.39,90 335.65,90.26 413.96,90.26 413.96,68.42 414.61,67.78
  pour cut-out: 175.21,723.52 175,723.73 175,740 308.52,740 318.64,729.87 314.98,726.21 177.91,726.21 175.21,723.52 175.21,739.79 175,740
  pour cut-out: 308.77,673.97 351.61,673.97 380,645.58 380,645 335.04,645 324.97,634.93 322.76,637.14 320.49,637.14 320.49,655.56 306.56,669.49 308.77,671.7
  pour cut-out: 266.5,493.24 279.76,493.24 323,450 326.7,450 271.45,505.25 270.47,504.26 266.5,504.26
Bottom Layer:
  pour cut-out: 925,714.49 925,735 941.64,735 943.94,732.69 943.94,729.99 940.5,729.99 940,720 929.4,715.45
  pour cut-out: 1086.98,428.18 1086.98,403.02 1096.38,403.02 1118.75,425.39 1194.08,425.39 1194.08,426.77 1196.86,429.55 1194.99,431.41 1194.99,436.16 1181.55,436.16 1180,434.61 1093.4,434.61
  pour cut-out: 1670.27,226.98 1670.27,222.64 1671.16,221.75 1672.43,223.02 1672.43,224.82
  pour cut-out: 1670,422.91 1671.16,421.75 1675.48,426.07 1675.48,432.9 1670,438.39
  pour cut-out: 1461.4,383.6 1455.96,379.42 1456.59,378.8
  pour cut-out: 1461.4,383.6 1461.4,361.4 1449,361.4 1440,370.39 1440,374.74 1452.53,374.74
  pour cut-out: 1750,480 1750,454.79 1744.52,449.31 1692.31,449.31 1675.69,432.69 1670,438.39 1670,465 1685,480
  pour cut-out: 1670.27,405 1670.27,226.98 1672.43,224.82 1692.61,245 1760,245 1760,410 1755,405
  pour cut-out: 1201.61,319.99 1201.61,363.39 1205.39,359.61 1366.23,359.61 1349.27,342.65 1343.37,348.55 1230.17,348.55
  pour cut-out: 1377.55,175.39 1377.55,167.7 1375.34,165.49 1373.8,174.87 1375.34,177.6
  pour cut-out: 1029.6,315 1045.51,315 1059.22,301.28 1046.64,288.7 1031.3,288.7 1021.56,298.44 1029.6,306.48

## Silkscreen, mask and mechanical layers (free items; w line width, h text height)
Top Overlay:
  lines w10: 1240,185 1240,625 1245,630 1760,630 1760,735 1505,735 1505,630
Bottom Overlay:
  text "JLINK-OB-DR_V1.0" at 990,640 h60
  text "2107-12-27" at 785,525 h60
Mechanical 1:
  lines w10: 0,365 1770,365
  text "板厚:1.6mm" at 415,-225 h100
  text "外形以KEEP-OUT为准" at 395,-355 h100

## Text inside footprints (layer, text, board x,y; h text height)
U2: Top Overlay "1" at 572.94,705.97 h50 r270; Top Overlay "3" at 572.94,525.97 h50 r270